# Altium PCB BidirectionalSwPCB.PcbDoc
Units mil, origin at the board's own origin, x right, y up, seen from the top; angles counter-clockwise.
Board outline 2720 x 2220 mil, 2 copper layers (Top Layer, Bottom Layer); 9 components, 12 nets, 43 pads, 42 vias.
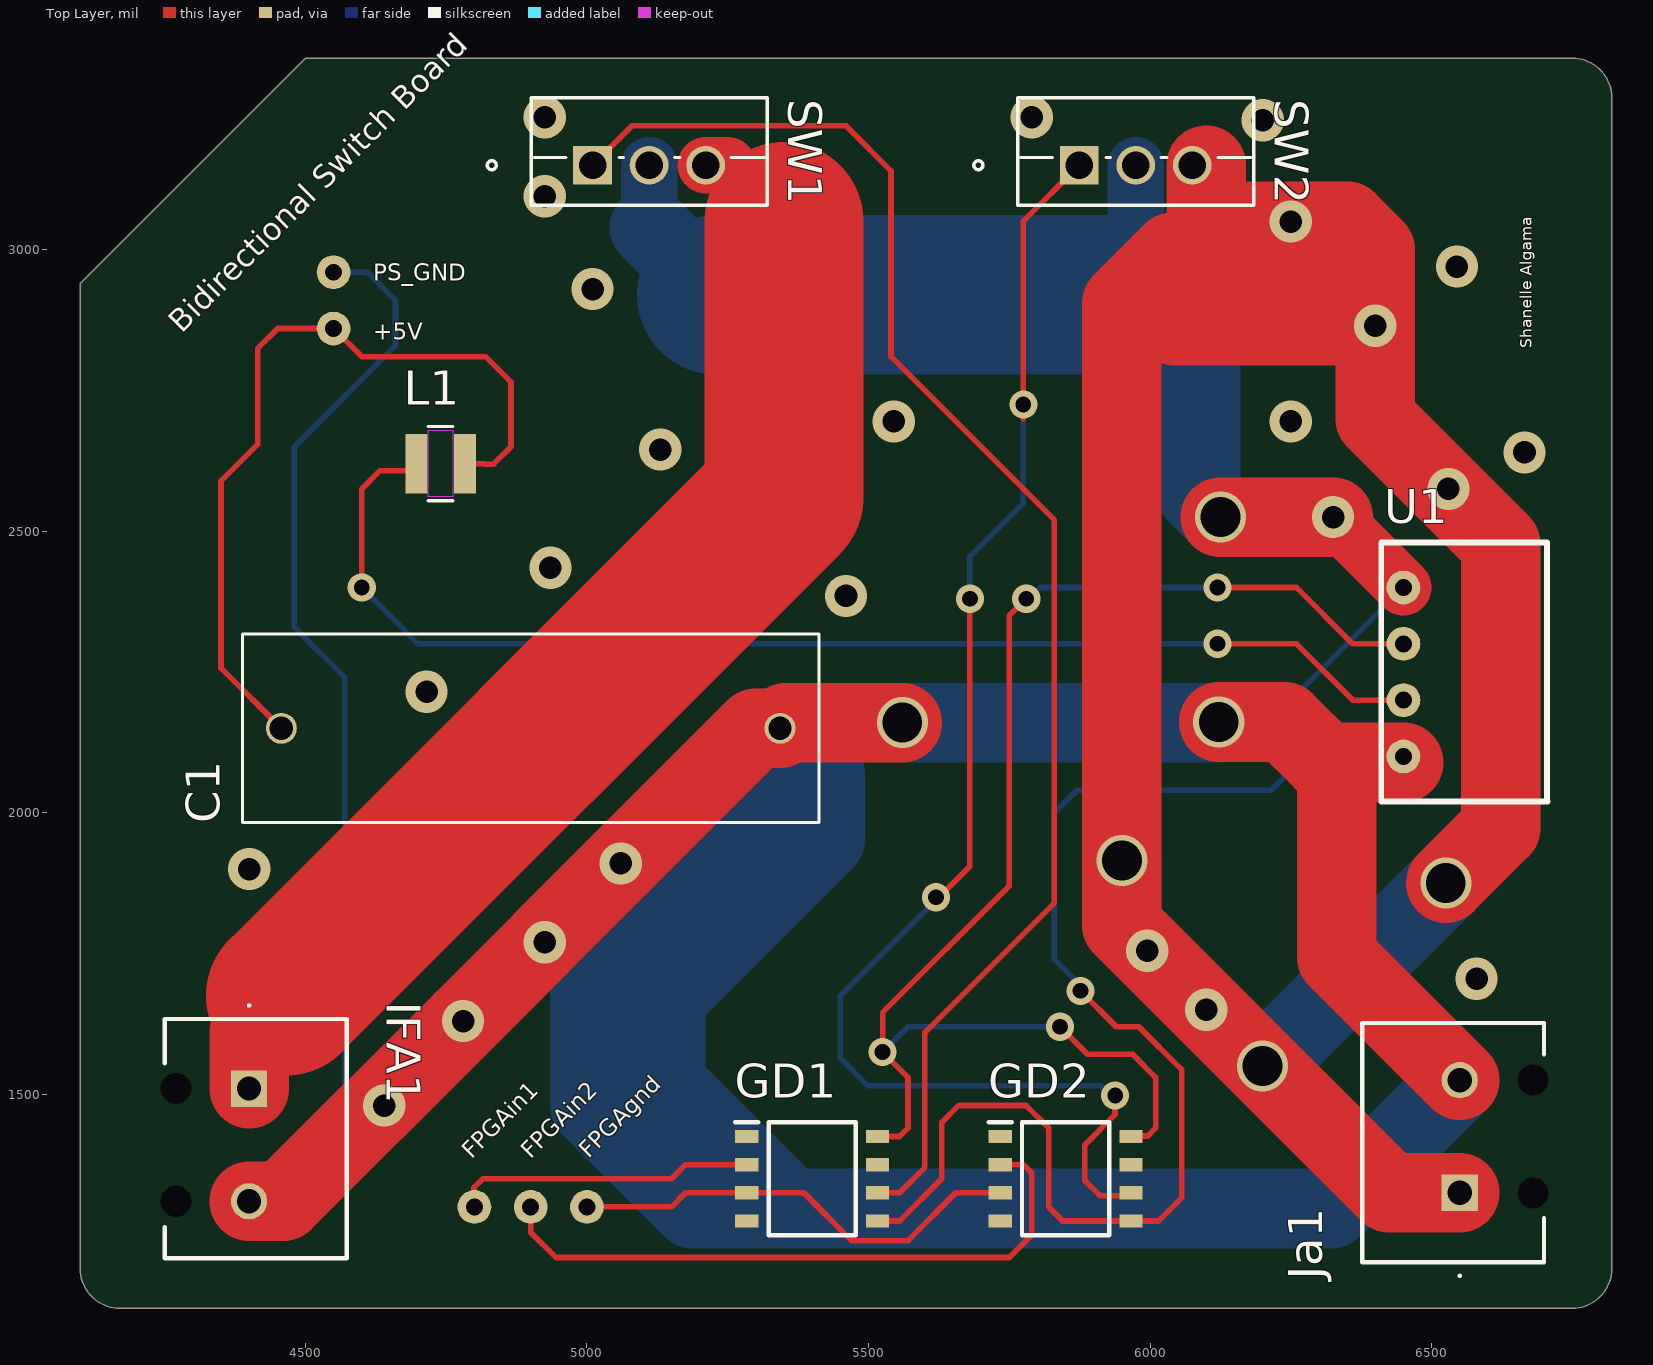
[diagram p0: Top Layer view]
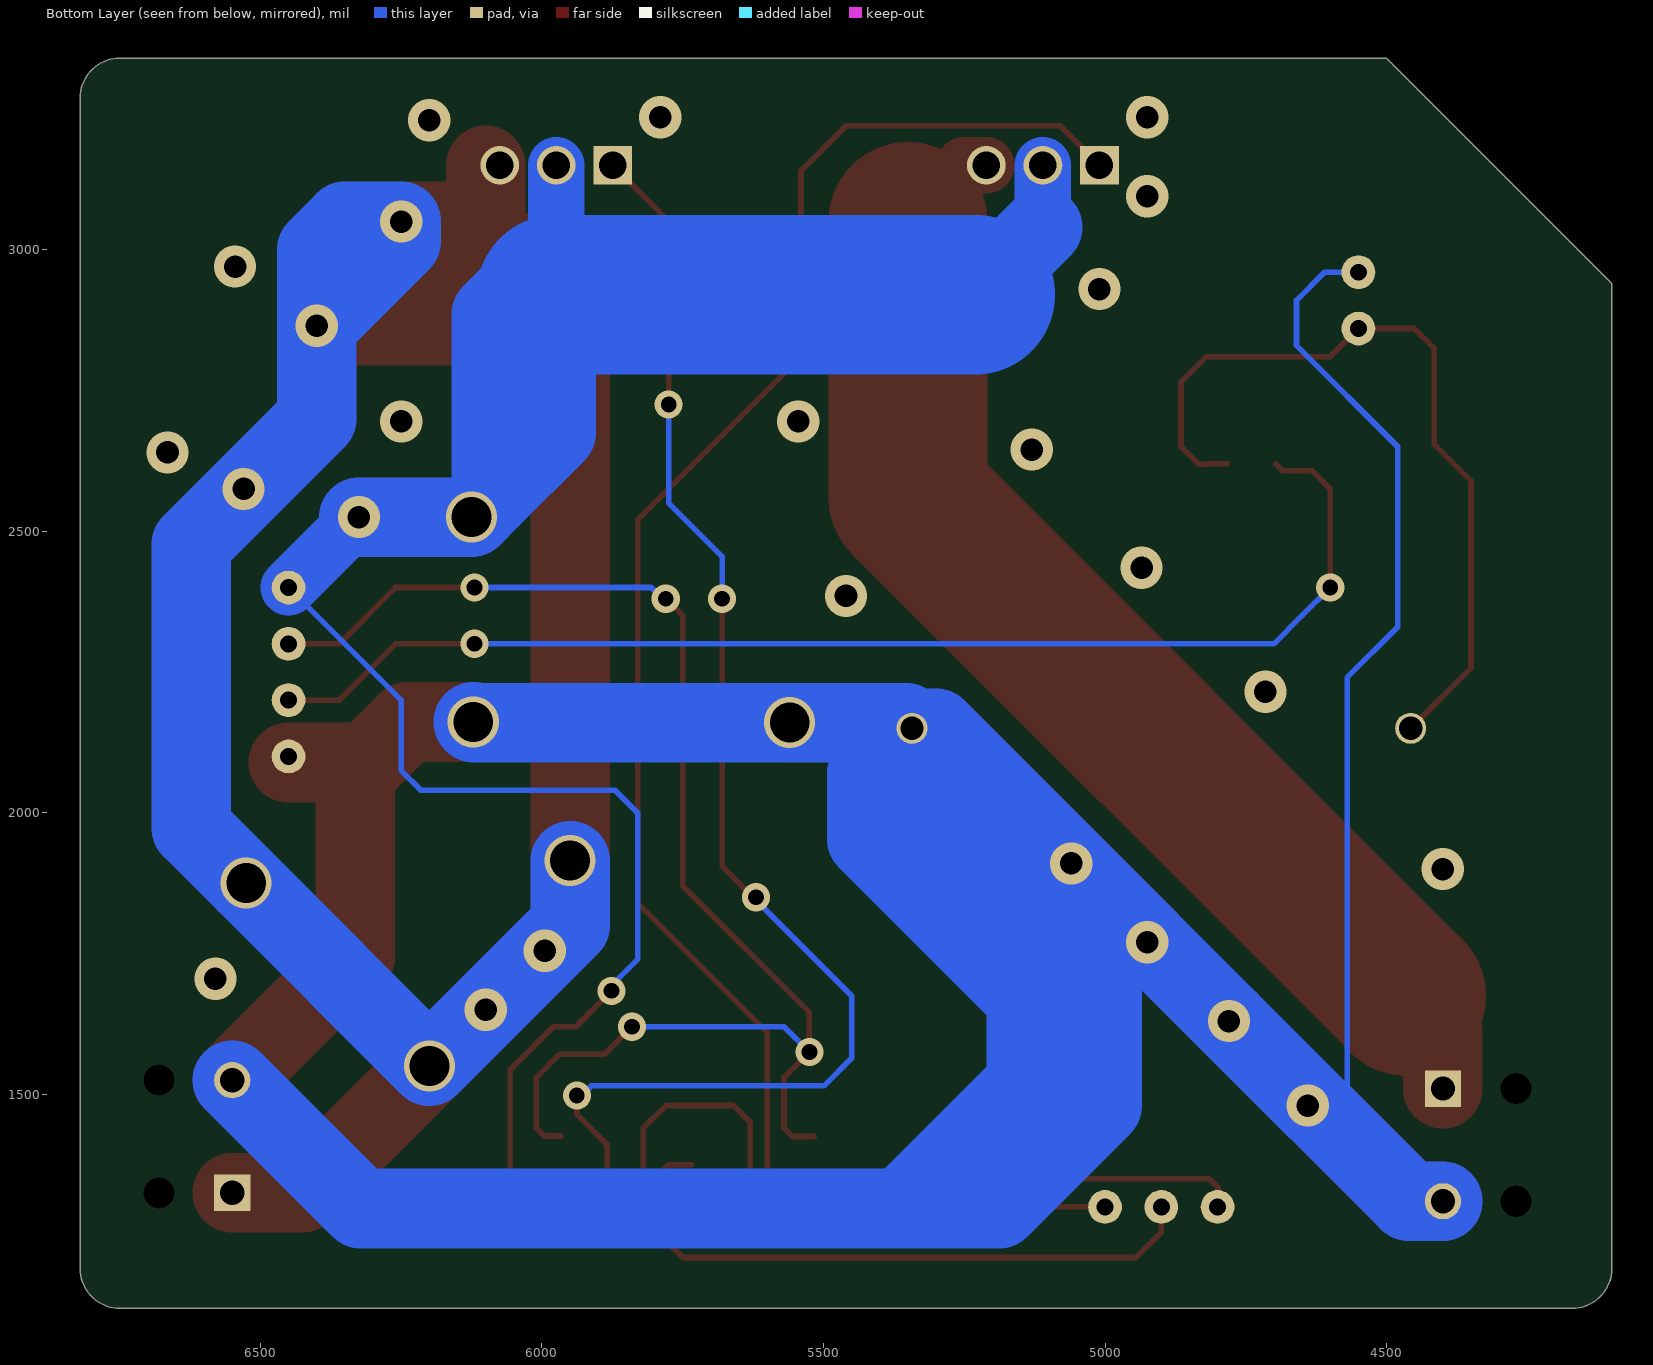
[diagram p1: Bottom Layer view, seen from below]
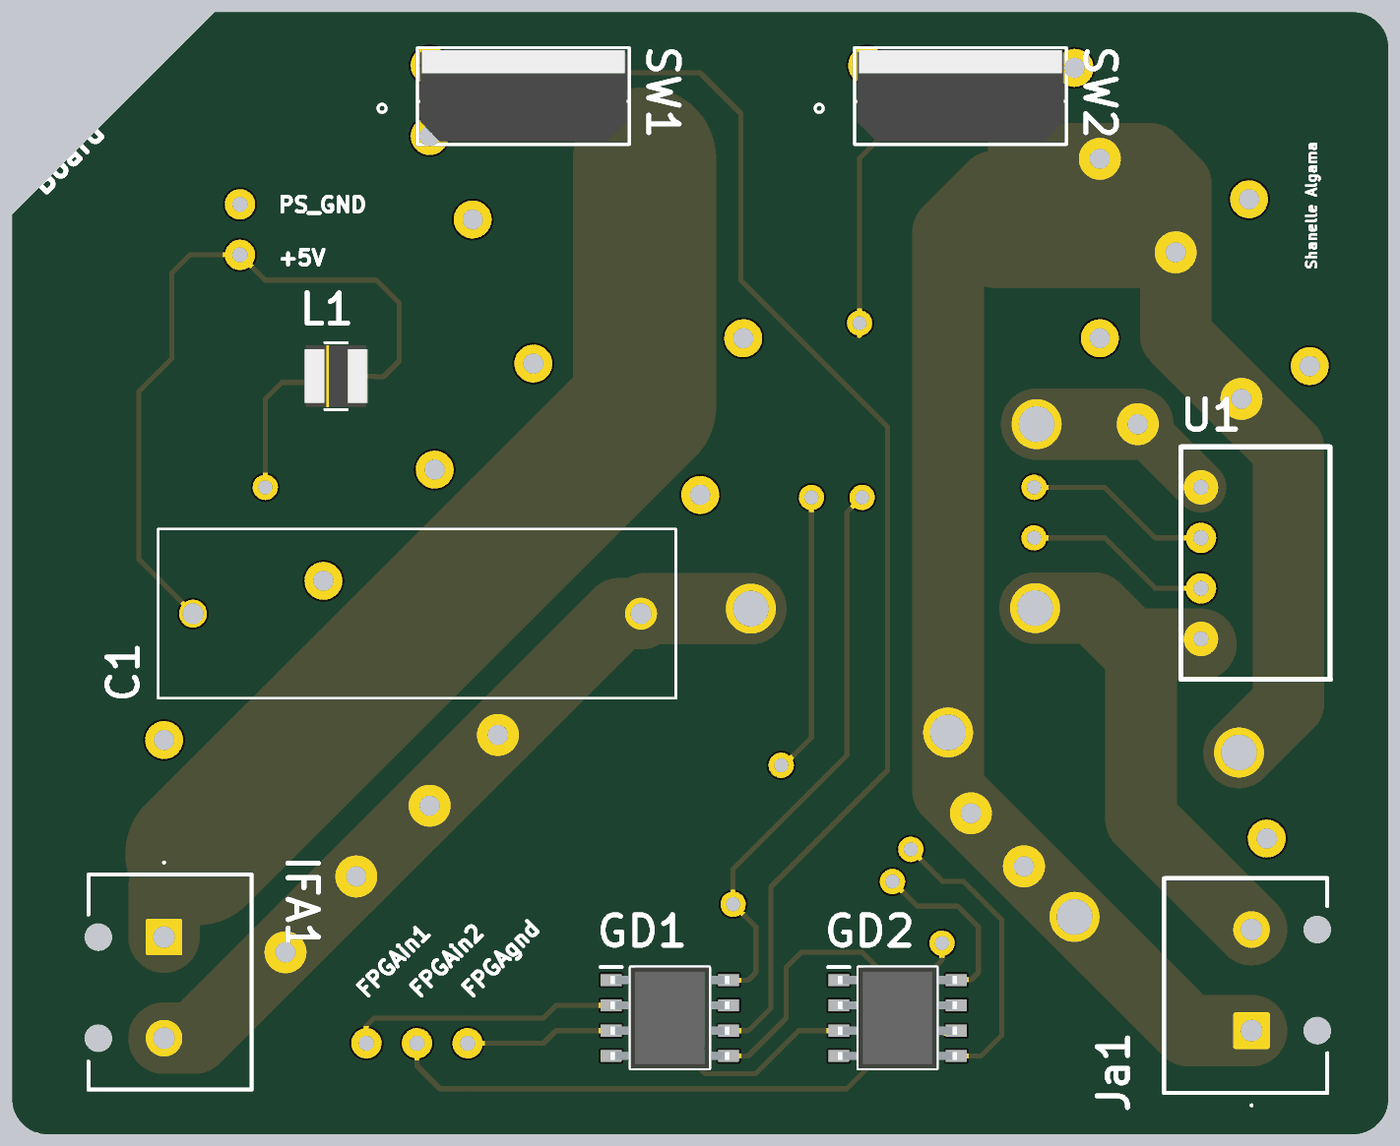
[diagram p2: 3D render of the assembled board from above, using the file's embedded part models]

## Layer stack, top to bottom
Top Solder: solder mask 0.4, Solder Resist, Dk 3.5
Top Layer: signal copper 1.4
Dielectric 1: dielectric 12.6, FR-4, Dk 4.8
Bottom Layer: signal copper 1.4
Bottom Solder: solder mask 0.4, Solder Resist, Dk 3.5

## Board outline
4100,1190 ccw(c4170,1190) 4170,1120 6750,1120 ccw(c6750,1190) 6820,1190 6820,2940 6820,3270 ccw(c6750,3270) 6750,3340 4500,3340 4100,2940

## Design rules (kind name [scope] priority, off if disabled: settings)
Clearance [All] p1: gap=10 ignorepadtopadclearanceinfootprint=FALSE
PolygonConnect [All] p1: connectstyle=Relief reliefconductorwidth=10 reliefentries=4 polygonreliefangle="90 Angle" airgapwidth=10
RoutingVias [All] p1: holewidth=28 width=50 viastyle="Through Hole" minholewidth=28 minwidth=50 maxholewidth=28 maxwidth=50
SolderMaskExpansion [All] p1: expansion=4 istentingtop=FALSE
Width [All] p1: maxlimit=283 minlimit=10 preferedwidth=141.5
30 further rules are at their usual default settings.

## Components (designator, comment, footprint, x,y, rotation, side; value= is the part's Value field where it differs from the comment)
C1 "ECQE2225KF" CAPRR2250W80L2600T850H1630 4900,2150 r180 top value=2.2uF
GD1 "HCPL-0302-000E" SOT127P599X361-8N 5400,1350 r0 top
GD2 "HCPL-0302-000E" SOT127P599X361-8N 5850,1350 r0 top
IFA1 "0398890042" 0398890042 4399.92,1510 r270 top
Ja1 "0398890042" 0398890042 6550,1325 r90 top
L1 "SRN3015-180M" IND_BOURNS_SRN3015 4740,2620 r0 top
SW1 "STGF10M65DF2" TO-220FP_STM 5010,3150 r0 top
SW2 "STGF10M65DF2" TO-220FP_STM 5874.21,3150 r0 top
U1 "2S4E_0515S1U" 2S4E_0515S1U 6450,2100 r90 top

## Footprints (in the part's own frame and the unit in brackets; to place one, negate y for a bottom-side part, rotate by r counter-clockwise, add the part's x,y. Pads: shape width x height; smd on the part's side, far side on the other; paste and mask are expansions set on the pad)
2S4E_0515S1U [mil] "SIP"
  round 60 hole 30: 1(0,0) 2(100,0) 3(200,0) 4(300,0)
  silkscreen extent -80,-256 380,39
0398890042 [mm]
  rect 1.635x1.635 hole 1.09: 1(0,0)
  round 1.635 hole 1.09: 2(5.08,0)
  round 0.7 hole 1.4 unplated: MH1(0,-3.3) MH2(5.08,-3.3)
  silkscreen extent -3.8,-3.8 7.66,4.4
CAPRR2250W80L2600T850H1630 [mm]
  round 1.4 hole 1.05: 1(-11.25,0) 2(11.25,0)
  silkscreen extent -13,-4.25 13,4.25
IND_BOURNS_SRN3015 [mil]
  rect 39x106 smd paste+0 mask+0: 1(-43,0) 2(43,0)
  Top Layer keep-out region: -21.5,-59 -21.5,59 21.5,59 21.5,-59
  silkscreen extent -22,-66 22,66, body extent -61,-61 61,61, height 59
SOT127P599X361-8N [mm]
  rect 1.05x0.6 smd: 1(-2.95,1.905) 2(-2.95,0.635) 3(-2.95,-0.635) 4(-2.95,-1.905) 5(2.95,-1.905) 6(2.95,-0.635) 7(2.95,0.635) 8(2.95,1.905)
  silkscreen extent -3.47,-2.54 1.97,2.56, body extent -3,-2.54 3,2.54, height 3.61
TO-220FP_STM [mil]
  rect 69x69 / inner round 60 / far side rect 69x69 hole 49 paste-99999 mask+0: 1(0,0)
  round 69 / inner round 60 / far side round 69 hole 49 paste-99999 mask+0: 2(100.39,0) 3(200.79,0)
  silkscreen extent -187,-71 310,120, body extent -104,-66 305,115, height 787

## Part data
C1: Package=None, Availability=Unavailable, MP=ECQE2225KF, Price=None
GD1 GD2: "Integrated Circuit", Manufacturer_Name="Avago Technologies", Mouser Part Number=630-HCPL-0302-000E, Datasheet Link=https://componentsearchengine.com/Datasheets/2/HCPL-0302-000E.pdf, Height=3.607mm, Manufacturer_Part_Number=HCPL-0302-000E, Mouser Price/Stock=https://www.mouser.co.uk/ProductDetail/Broadcom-Avago/HCPL-0302-000E?qs=xnajaXqBF98nZXSlVjkZuQ%3D%3D
IFA1 Ja1: "Conn Eurostyle Block 2 POS 5.08mm Solder ST Thru-Hole 17.5A/Contact", Manufacturer_Name=Molex, Datasheet Link=https://tools.molex.com/pdm_docs/sd/398890042_sd.pdf, Geometry.Height=10.25mm, Manufacturer_Part_Number=0398890042
L1: "No Description Available", Mfr_Name="Bourns Electronics"
SW1 SW2: "No Description Available", Mfr_Name=STMicroelectronics, RefDes=RefDes, Type=Type
U1: "2S4E_0515S1U DC-DC Converter", ComponentLink1Description="New link", ComponentLink1URL=https://gaptec-electronic.com/datenblaetter/2S4E_1U.pdf

## Free pads (board coordinates)
  round 60 hole 30: 15(4550,2860) 15(5000,1300) 16(4900,1300) 17(4800,1300) 18(4550,2960)

## Via types
v1: diameter 75, hole 40, Top Layer to Bottom Layer, 25 vias
v2: diameter 50, hole 28, Top Layer to Bottom Layer, 11 vias
v3: diameter 90.75, hole 70.75, Top Layer to Bottom Layer, 6 vias

## Nets (pads, with @x,y where several pads share a name; then routed paths per layer and width w, separated by ;. In a path a pad name is that pad's centre, name@x,y a point inside that pad or via, vN(x,y) a via of type N, cw(c..) or ccw(c..) an arc to the next point about the centre after c; other vN are vias at no path point)
+5: C1.2 L1.2 pad.15@4550,2860 | length 1459.8
  Top Layer w10: C1.2 4350,2257.09 4350,2589.14 4415,2654.14 4415,2824.26 4450.74,2860 4550,2860 4600,2810 4820,2810 4865,2765 4865,2650 4834.14,2619.14 4818.36,2619.14 4817.5,2620 L1.2
+Vo: GD1.8 GD2.8 U1.3 | length 2525
  Top Layer w10: GD1.8 5555,1425 5570,1440 5570,1530 v2(5525,1575) 5525,1645 5750,1870 5750,2350 v2(5780,2380) ; v2(5840,1620) 5889,1571 5969,1571 6010,1530 6010,1440 5995.95,1425.95 5967.09,1425.95 GD2.8 ; v2(6120,2400) 6260,2400 6360,2300 U1.3
  Bottom Layer w10: v2(5525,1575) 5570,1620 v2(5840,1620) ; v2(5780,2380) 5785.86,2380 5805.86,2400 v2(6120,2400)
FPGA_GND: GD1.3 GD2.3 pad.15@5000,1300 | length 814.6
  Top Layer w10: pad.15@5000,1300 5150,1300 5175,1325 GD1.3 5385,1325 5470,1240 5570,1240 5655,1325 GD2.3
FPGAin1: GD1.2 pad.17 | length 551.9
  Top Layer w10: pad.17 4799.39,1300.61 4799.39,1334.39 4815,1350 5150,1350 5175,1375 GD1.2 5278.86,1375 5275,1375 GD1.2@5270,1370
FPGAin2: GD2.2 pad.16 | length 1142.6
  Top Layer w10: pad.16 4900,1255 4945,1210 5750,1210 5790,1250 5790,1360 5775,1375 GD2.2
GND: C1.1 IFA1.2 Ja1.2 pad.18 U1.1 | length 9902.4
  Top Layer w141.5: IFA1.2 4460,1310 v1(4780,1630) v1(5060,1910) 5300,2150 C1.1 ; C1.1@5352.91,2160 v3(5560,2160) ; v3(6122,2161) 6239,2161 6310.75,2089.25 ; U1.1@6450,2089.25 6310.75,2089.25 ; Ja1.2 6331.5,1743.5 6331.5,2068.5 6310.75,2089.25
  Bottom Layer w10: IFA1.2 4439.92,1350 ; pad.18 4610,2960 4660,2910 4660,2830 4480,2650 4480,2330 4570,2240 4570,1480.08
  Bottom Layer w141.5: IFA1.2 4460,1310 v1(4780,1630) v1(5060,1910) 5300,2150 C1.1 5388.96,2103.96 ; C1.1@5352.91,2160 v3(5560,2160) 6121,2160 v3(6122,2161) ; Ja1.2 6322,1297 5363,1297 ; 5363,1297 5188,1297 5005,1480 5005,1720 5388.96,2103.96 ; 5363,1297 5140,1520 5140,1670 5422.85,1952.85 5422.85,2070.07 5388.96,2103.96
  other v1: 4640,1480 4925,1770
IFA: IFA1.1 SW1.3 | length 2114.2
  Top Layer w100: SW1.3 5250,3150 5350,3050
  Top Layer w141.5: IFA1.1 4399.92,1609.92 4465,1675
  Top Layer w283: 4465,1675 5350,2560 5350,3050
ISOL_GND: GD1.5 GD2.5 SW1.2 SW2.2 U1.4 | length 5307
  Top Layer w10: GD1.5 5555,1275 5630,1350 5630,1450 5660,1480 5780,1480 5820,1440 5820,1300 5845,1275 GD2.5@5955,1275 ; v2(5876.32,1683.68) 5940,1620 5980,1620 6056,1544 6056,1316 6015,1275 GD2.5
  Top Layer w100: v1(6325,2525) U1.4
  Top Layer w141.5: v3(6125,2525) v1(6325,2525)
  Bottom Layer w10: v2(5876.32,1683.68) 5876.32,1693.22 5830,1739.54 5830,2000 5870,2040 6215,2040 6250,2075 6250,2200 U1.4
  Bottom Layer w100: 5110.39,3039.61 SW1.2 ; 5974.61,3025.39 SW2.2 ; v1(6325,2525) U1.4
  Bottom Layer w141.5: 5110.39,3039.61 5230,2920 ; 5975,2920 5975,2675 6090,2560 ; 6015,2960 6090,2885 6090,2560 ; v1(6325,2525) v3(6125,2525) 6090,2560
  Bottom Layer w283: 5230,2920 5975,2920
NetGD1_6: GD1.6 SW1.1 | length 2680
  Top Layer w10: SW1.1 5080,3220 5460,3220 5540,3140 5540,2810 5830,2520 5830,1840 5600,1610 5600,1370 5555,1325 GD1.6
NetGD2_6: GD2.6 SW2.1 | length 2553.1
  Top Layer w10: v2@5625,1850 5680,1905 v2(5680,2380) ; 5775,2700 v2(5775,2725) 5775,3050.79 SW2.1 ; v2(5938,1498) 5937.73,1497.73 5937.73,1463.86 5884,1410.13 5884,1347 5911,1320 5961.14,1320 GD2.6
  Bottom Layer w10: v2@5612.5,1837.5 5450,1675 5450,1564 5499,1515 5912.14,1515 5929.14,1498 v2(5938,1498) ; v2(5680,2380) 5680,2455 5775,2550 v2(5775,2725)
  other v2: 5620,1850
NetL1_1: L1.1 U1.2 | length 2223.5
  Top Layer w10: v2(4600,2400) 4600,2575 4632.68,2607.68 4684.68,2607.68 L1.1 ; v2(6120,2300) 6260,2300 6360,2200 U1.2
  Bottom Layer w10: v2(4600,2400) 4650,2350 4700,2300 v2(6120,2300)
VoutA1: Ja1.1 SW2.3 | length 7100.5
  Top Layer w141.5: 6040,2995 5990,2945 ; 6043.66,2865 v1(6400,2865) ; 6100,3000 SW2.3@6100,3150 ; 6150,3050 v1(6250,3050) 6350,3050 6400,3000 ; v3(6525.24,1875.24) 6623,1973 6623,2477 6400,2700 v1(6400,2865) ; Ja1.1 6425,1325 5950,1800 v3(5950,1915) 5950,2905 5990,2945 ; 5990,2945 6345,2945 6400,3000 ; v1(6400,2865) 6400,3000
  Bottom Layer w141.5: v3(5950,1915) 5950,1800 v3(6200,1550) v3(6525.24,1875.24) 6623,1973 6623,2477 6400,2700 v1(6400,2865) ; v1(6400,2865) 6250,3015 v1(6250,3050) 6350,3050 6400,3000 v1(6400,2865)
  other v1: 6100,1650 5995,1755 6530,2575
pads on no net: GD1.1 GD1.4 GD1.7 GD2.1 GD2.4 GD2.7 IFA1.MH1 IFA1.MH2 Ja1.MH1 Ja1.MH2
copper on no net:
  other v1: 6580,1705 4400,1900 4715,2215 5460,2385 4935,2435 6665,2640 5130,2645 5545,2695 6250,2695 5010,2930 6545,2970 4925,3095 6200,3230 4925,3235 5790,3235

## Silkscreen, mask and mechanical layers (free items; w line width, h text height)
Top Overlay:
  text "PS_GND" at 4620,2945 h30
  text "Bidirectional Switch Board" at 4280,2850 h40 r45
  text "+5V" at 4620,2840 h30
  text "Shanelle Algama" at 6678.34,2825 h20 r90
  text "FPGAin1" at 4795,1384.14 h30 r45
  text "FPGAin2" at 4900,1384.14 h30 r45
  text "FPGAgnd" at 5002.93,1384.21 h30 r45
Mechanical 1:
  lines w10: 4100,1190 ccw(c4170,1190) 4170,1120 6750,1120 ccw(c6750,1190) 6820,1190 6820,2940 6820,3270 ccw(c6750,3270) 6750,3340 6420,3340 4500,3340 4100,2940 4100,2630 4100,1190

## Text inside footprints (layer, text, board x,y; h text height)
SW1: Mechanical 13 "TAB" at 5091.64,3199.17 h25
SW2: Mechanical 13 "TAB" at 5955.86,3199.17 h25